# Altium PCB 显示与输入.PcbDoc (part 2 of 2)
Units mil, origin at the board's own origin, x right, y up, seen from the top; angles counter-clockwise.
Board outline 6446.74 x 5131.17 mil, 2 copper layers (Top Layer, Bottom Layer); 64 components, 63 nets, 238 pads, 176 vias.
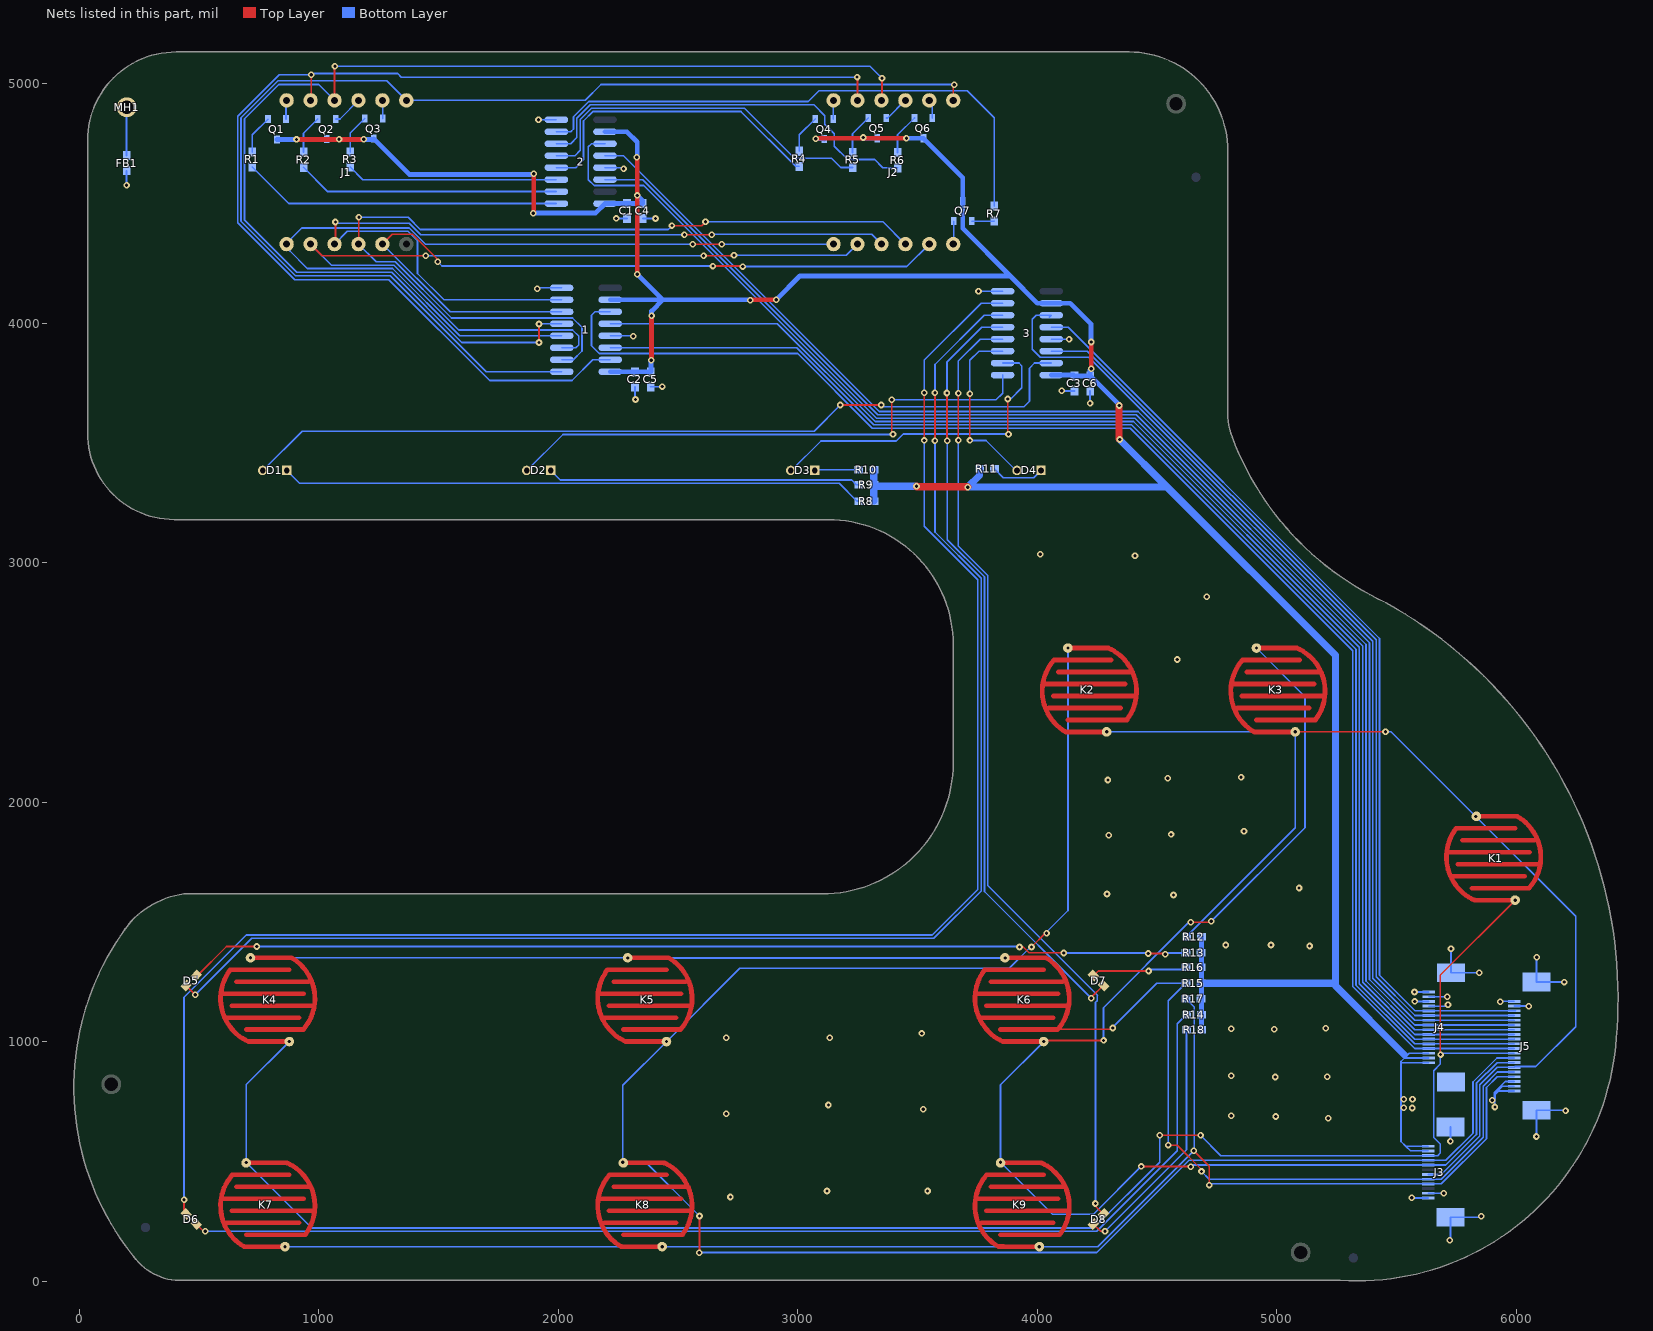
[diagram p2: the nets of this part, all layers, seen from the top]

## Footprints (in the part's own frame and the unit in brackets; to place one, negate y for a bottom-side part, rotate by r counter-clockwise, add the part's x,y. Pads: shape width x height; smd on the part's side, far side on the other; paste and mask are expansions set on the pad) (continued)
PCB-KEY#8 [mil]
  round 40 smd: 1(-169.96,-72) 2(179.96,90)
  Top Layer lines w20: 30,190 30,-150 ; -70,170 -70,-111.04 -70,-130 ; -20,150 -20,-190 ; 128.92,148.76 ccw(c0,0) -169.67,99.81 ; 130,148.76 130,-90 ; -169.88,97.95 -169.96,-72 ; -120,90 -120,-138.8 -120,-157.48 ; 179.88,-79.95 cw(c0,0) 80,-179.86 ; 179.88,-79.95 cw(c0,0) 80,-179.86 ; 179.88,-79.95 179.88,-79.95 ; 179.88,-79.95 179.88,-79.95 ; 179.88,-79.95 179.88,-79.95 ; 179.88,-79.95 179.88,-79.95 ; 179.88,-79.95 179.88,-79.95 ; 179.88,-79.95 179.88,-79.95 ; 179.88,-79.95 179.88,-79.95 ; 179.88,-79.95 179.88,-79.95 ; 179.88,-79.95 179.88,-79.95 ; 179.88,-79.95 179.88,-79.95 ; 179.88,-79.95 179.88,-79.95 ; 179.88,-79.95 179.88,-79.95 ; 179.88,-79.95 179.88,-79.95 ; 179.88,-79.95 179.88,-79.95 ; 179.88,-79.95 179.88,-79.95 ; 179.88,-79.95 179.88,-79.95 ; 179.88,-79.95 179.88,-79.95 ; 179.88,-79.95 179.88,-79.95 ; 179.88,-79.95 179.88,-79.95 ; 179.88,-79.95 179.88,-79.95 ; 179.88,-79.95 179.88,-79.95 ; 179.88,-79.95 179.88,-79.95 ; 179.88,-79.95 179.88,-79.95 ; 179.88,-79.95 179.88,-79.95 ; 179.88,-79.95 179.88,-79.95 ; 179.88,-79.95 179.88,-79.95 ; 179.88,-79.95 179.88,-79.95 ; 179.88,-79.95 179.88,-79.95 ; 179.88,-79.95 179.88,-79.95 ; 179.88,-79.95 179.88,-79.95 ; 179.88,-79.95 179.88,-79.95 ; 179.88,-79.95 179.88,-79.95 ; 179.88,-79.95 179.88,-79.95 ; 179.88,-79.95 179.88,-79.95 ; 179.88,-79.95 179.88,-79.95 ; 179.88,-79.95 179.88,-79.95 ; 179.88,-79.95 179.88,-79.95 ; 179.88,-79.95 179.88,-79.95 ; 179.88,-79.95 179.88,-79.95 ; 179.88,-79.95 179.88,-79.95 ; 179.88,-79.95 179.88,-79.95 ; 179.88,-79.95 179.88,-79.95 ; 179.88,-79.95 179.88,-79.95 ; 179.88,-79.95 179.88,-79.95 ; 179.88,-79.95 179.88,-79.95 ; 179.88,-79.95 179.88,-79.95 ; 179.88,-79.95 179.88,-79.95 ; 179.88,-79.95 179.88,-79.95 ; 179.88,-79.95 179.88,-79.95 ; 179.88,-79.95 179.88,-79.95 ; 179.88,-79.95 179.88,-79.95 ; 179.88,-79.95 179.88,-79.95 ; 179.88,-79.95 179.88,-79.95 ; 179.88,-79.95 179.88,-79.95 ; 179.88,-79.95 179.88,-79.95 ; 179.88,-79.95 179.96,90 179.88,-79.95 ; 179.88,-79.95 179.88,-79.95 ; 179.88,-79.95 179.88,-79.95 ; 179.88,-79.95 179.88,-79.95 ; 179.88,-79.95 179.88,-79.95 ; 179.88,-79.95 179.88,-79.95 ; 179.88,-79.95 179.88,-79.95 ; 179.88,-79.95 179.88,-79.95 ; 179.88,-79.95 179.88,-79.95 ; 179.88,-79.95 179.88,-79.95 ; 179.88,-79.95 179.88,-79.95 ; 179.88,-79.95 179.88,-79.95 ; 179.88,-79.95 179.88,-79.95 ; 179.88,-79.95 179.88,-79.95 ; 179.88,-79.95 179.88,-79.95 ; 179.88,-79.95 179.88,-79.95 ; 179.88,-79.95 179.88,-79.95 ; 179.88,-79.95 179.88,-79.95 ; 179.88,-79.95 179.88,-79.95 ; 179.88,-79.95 179.88,-79.95 ; 179.88,-79.95 179.88,-79.95 ; 179.88,-79.95 179.88,-79.95 ; 179.88,-79.95 179.88,-79.95 ; 179.88,-79.95 179.88,-79.95 ; 179.88,-79.95 179.88,-79.95 ; 179.88,-79.95 179.88,-79.95 ; 179.88,-79.95 179.88,-79.95 ; 179.88,-79.95 179.88,-79.95 ; 179.88,-79.95 179.88,-79.95 ; 179.88,-79.95 179.88,-79.95 ; 179.88,-79.95 179.88,-79.95 ; 179.88,-79.95 179.88,-79.95 ; 179.88,-79.95 179.88,-79.95 ; 179.88,-79.95 179.88,-79.95 ; 179.88,-79.95 179.88,-79.95 ; 179.88,-79.95 179.88,-79.95 ; 179.88,-79.95 179.88,-79.95 ; 179.88,-79.95 179.88,-79.95 ; 80,-179.86 cw(c0,0) 51.48,-190 cw(c0,0) -118.11,-157.48 ccw(c0,0) 80,-179.86 ; 80,-179.86 80,-180 80,-179.86 ; 80,-179.86 80,-179.86 ; 80,-179.86 80,-179.86 ; 80,-179.86 80,-179.86 ; 80,-179.86 80,-179.86 ; 80,-179.86 80,-179.86 ; 80,-179.86 80,-179.86 ; 80,-179.86 80,-179.86 ; 80,-179.86 80,-179.86 ; 80,-179.86 80,-179.86 ; 80,-179.86 80,-179.86 ; 80,-179.86 80,-179.86 ; 80,-179.86 80,-179.86 ; 80,-179.86 80,-179.86 ; 80,-179.86 80,-179.86 ; 80,-179.86 80,-179.86 ; 80,-179.86 80,-179.86 ; 80,-179.86 80,-179.86 ; 80,-179.86 80,-179.86 ; 80,-179.86 80,-179.86 ; 80,-179.86 80,-179.86 ; 80,-179.86 80,-179.86 ; 80,-179.86 80,-179.86 ; 80,-179.86 80,-179.86 ; 80,-179.86 80,-179.86 ; 80,-179.86 80,-179.86 ; 80,-179.86 80,-179.86 ; 80,-179.86 80,-179.86 ; 80,-179.86 80,-179.86 ; 80,-179.86 80,-179.86 ; 80,-179.86 80,-179.86 ; 80,-179.86 80,-179.86 ; 80,-179.86 80,-179.86 ; 80,-179.86 80,-179.86 ; 80,-179.86 80,-179.86 ; 80,-179.86 80,-179.86 ; 80,-179.86 80,-179.86 ; 80,-179.86 80,-179.86 ; 80,-179.86 80,-179.86 ; 80,-179.86 80,-179.86 ; 80,-179.86 80,-179.86 ; 80,-179.86 80,-179.86 ; 80,-179.86 80,-179.86 ; 80,-179.86 80,-179.86 ; 80,-179.86 80,-179.86 ; 80,-179.86 80,-179.86 ; 80,-179.86 80,-179.86 ; 80,-179.86 80,-179.86 ; 80,-179.86 80,-179.86 ; 80,-179.86 80,-179.86 ; 80,-179.86 80,-179.86 ; 80,-179.86 80,-179.86 ; 80,-179.86 80,-179.86 ; 80,-179.86 80,-179.86 ; 80,-179.86 80,-179.86 ; 80,-179.86 80,-179.86 ; 80,-179.86 80,-179.86 ; 80,-179.86 80,-179.86 ; 80,-179.86 80,-179.86 ; 80,-179.86 80,-179.86 ; 80,-179.86 80,-179.86 ; 80,-179.86 80,-179.86 ; 80,-179.86 80,-179.86 ; 80,-179.86 80,-179.86 ; 80,-179.86 80,-179.86 ; 80,-179.86 80,-179.86 ; 80,-179.86 80,-179.86 ; 80,-179.86 80,-179.86 ; 80,-179.86 80,-179.86 ; 80,-179.86 80,-179.86 ; 80,-179.86 80,-179.86 ; 80,-179.86 80,-179.86 ; 80,-179.86 80,-179.86 ; 80,-179.86 80,-179.86 ; 80,-179.86 80,-179.86 ; 80,-179.86 80,-179.86 ; 80,-179.86 80,-179.86 ; 80,-179.86 80,-179.86 ; 80,-179.86 80,-179.86 ; 80,-179.86 80,-179.86 ; 80,-179.86 80,-179.86 ; 80,-179.86 80,-179.86 ; 80,-179.86 80,-179.86 ; 80,-179.86 80,-179.86 ; 80,-179.86 80,-179.86 ; 80,-179.86 80,-179.86 ; 80,-179.86 80,-179.86 ; 80,-179.86 80,-179.86 ; 80,-179.86 80,-179.86 ; 80,-179.86 80,-179.86 ; 80,-179.86 80,-179.86 ; 80,-179.86 80,-179.86 ; 80,-179.86 80,130 80,-179.86 ; 80,-179.86 80,-179.86
PCB-KEY#9 [mil]
  round 40 smd: 1(-169.96,-72) 2(179.96,90)
  Top Layer lines w20: 30,190 30,-122.52 30,-150 ; -70,170 -70,78.05 -70,-130 ; -20,150 -20,-152.99 -20,-190 ; 128.92,148.76 ccw(c0,0) -169.67,99.81 ; 130,148.76 130,77.97 130,-90 ; -169.88,97.95 -169.89,77.07 -169.96,-72 ; -120,90 -120,-157.48 ; 179.96,90 179.96,89.51 ; 179.96,89.51 179.88,-79.95 ; 179.96,89.51 179.88,-79.95 ; 179.88,-79.95 cw(c0,0) 80,-179.86 ; 179.88,-79.95 cw(c0,0) 80,-179.86 ; 179.88,-79.95 179.88,-79.95 ; 179.88,-79.95 179.88,-79.95 ; 179.88,-79.95 179.88,-79.95 ; 179.88,-79.95 179.88,-79.95 ; 179.88,-79.95 179.88,-79.95 ; 179.88,-79.95 179.88,-79.95 ; 179.88,-79.95 179.88,-79.95 ; 179.88,-79.95 179.88,-79.95 ; 179.88,-79.95 179.88,-79.95 ; 179.88,-79.95 179.88,-79.95 ; 179.88,-79.95 179.88,-79.95 ; 179.88,-79.95 179.88,-79.95 ; 179.88,-79.95 179.88,-79.95 ; 179.88,-79.95 179.88,-79.95 ; 179.88,-79.95 179.88,-79.95 ; 179.88,-79.95 179.88,-79.95 ; 179.88,-79.95 179.88,-79.95 ; 179.88,-79.95 179.88,-79.95 ; 179.88,-79.95 179.88,-79.95 ; 179.88,-79.95 179.88,-79.95 ; 179.88,-79.95 179.88,-79.95 ; 179.88,-79.95 179.88,-79.95 ; 179.88,-79.95 179.88,-79.95 ; 179.88,-79.95 179.88,-79.95 ; 179.88,-79.95 179.88,-79.95 ; 179.88,-79.95 179.88,-79.95 ; 179.88,-79.95 179.88,-79.95 ; 179.88,-79.95 179.88,-79.95 ; 179.88,-79.95 179.88,-79.95 ; 179.88,-79.95 179.88,-79.95 ; 179.88,-79.95 179.88,-79.95 ; 179.88,-79.95 179.88,-79.95 ; 179.88,-79.95 179.88,-79.95 ; 179.88,-79.95 179.88,-79.95 ; 179.88,-79.95 179.88,-79.95 ; 179.88,-79.95 179.88,-79.95 ; 179.88,-79.95 179.88,-79.95 ; 179.88,-79.95 179.88,-79.95 ; 179.88,-79.95 179.88,-79.95 ; 179.88,-79.95 179.88,-79.95 ; 179.88,-79.95 179.88,-79.95 ; 179.88,-79.95 179.88,-79.95 ; 179.88,-79.95 179.88,-79.95 ; 179.88,-79.95 179.88,-79.95 ; 179.88,-79.95 179.88,-79.95 ; 179.88,-79.95 179.88,-79.95 ; 179.88,-79.95 179.88,-79.95 ; 179.88,-79.95 179.88,-79.95 ; 179.88,-79.95 179.88,-79.95 ; 179.88,-79.95 179.88,-79.95 ; 179.88,-79.95 179.88,-79.95 ; 179.88,-79.95 179.88,-79.95 ; 179.88,-79.95 179.88,-79.95 ; 179.88,-79.95 179.88,-79.95 ; 179.88,-79.95 179.88,-79.95 ; 179.88,-79.95 179.88,-79.95 ; 179.88,-79.95 179.88,-79.95 ; 179.88,-79.95 179.88,-79.95 ; 179.88,-79.95 179.88,-79.95 ; 179.88,-79.95 179.88,-79.95 ; 179.88,-79.95 179.88,-79.95 ; 179.88,-79.95 179.88,-79.95 ; 179.88,-79.95 179.88,-79.95 ; 179.88,-79.95 179.88,-79.95 ; 179.88,-79.95 179.88,-79.95 ; 179.88,-79.95 179.88,-79.95 ; 179.88,-79.95 179.88,-79.95 ; 179.88,-79.95 179.88,-79.95 ; 179.88,-79.95 179.88,-79.95 ; 179.88,-79.95 179.88,-79.95 ; 179.88,-79.95 179.88,-79.95 ; 179.88,-79.95 179.88,-79.95 ; 179.88,-79.95 179.88,-79.95 ; 179.88,-79.95 179.88,-79.95 ; 179.88,-79.95 179.88,-79.95 ; 179.88,-79.95 179.88,-79.95 ; 179.88,-79.95 179.88,-79.95 ; 179.88,-79.95 179.88,-79.95 ; 179.88,-79.95 179.88,-79.95 ; 179.88,-79.95 179.88,-79.95 ; 179.88,-79.95 179.88,-79.95 ; 179.88,-79.95 179.88,-79.95 ; 179.88,-79.95 179.88,-79.95 ; 179.88,-79.95 179.88,-79.95 ; 179.88,-79.95 179.88,-79.95 ; 179.88,-79.95 179.88,-79.95 ; 179.88,-79.95 179.88,-79.95 ; 179.88,-79.95 179.88,-79.95 ; 179.88,-79.95 179.88,-79.95 ; 179.88,-79.95 179.88,-79.95 ; 80,-179.86 cw(c0,0) 51.48,-190 cw(c0,0) 22.56,-195.55 cw(c0,0) -118.11,-157.48 ccw(c0,0) 80,-179.86 ; 80,-179.86 80,-180 80,-179.86 ; 80,-179.86 80,-179.86 ; 80,-179.86 80,-179.86 ; 80,-179.86 80,-179.86 ; 80,-179.86 80,-179.86 ; 80,-179.86 80,-179.86 ; 80,-179.86 80,-179.86 ; 80,-179.86 80,-179.86 ; 80,-179.86 80,-179.86 ; 80,-179.86 80,-179.86 ; 80,-179.86 80,-179.86 ; 80,-179.86 80,-179.86 ; 80,-179.86 80,-179.86 ; 80,-179.86 80,-179.86 ; 80,-179.86 80,-179.86 ; 80,-179.86 80,-179.86 ; 80,-179.86 80,-179.86 ; 80,-179.86 80,-179.86 ; 80,-179.86 80,-179.86 ; 80,-179.86 80,-179.86 ; 80,-179.86 80,-179.86 ; 80,-179.86 80,-179.86 ; 80,-179.86 80,-179.86 ; 80,-179.86 80,-179.86 ; 80,-179.86 80,-179.86 ; 80,-179.86 80,-179.86 ; 80,-179.86 80,-179.86 ; 80,-179.86 80,-179.86 ; 80,-179.86 80,-179.86 ; 80,-179.86 80,-179.86 ; 80,-179.86 80,-179.86 ; 80,-179.86 80,-179.86 ; 80,-179.86 80,-179.86 ; 80,-179.86 80,-179.86 ; 80,-179.86 80,-179.86 ; 80,-179.86 80,-179.86 ; 80,-179.86 80,-179.86 ; 80,-179.86 80,-179.86 ; 80,-179.86 80,-179.86 ; 80,-179.86 80,-179.86 ; 80,-179.86 80,-179.86 ; 80,-179.86 80,-179.86 ; 80,-179.86 80,-179.86 ; 80,-179.86 80,-179.86 ; 80,-179.86 80,-179.86 ; 80,-179.86 80,-179.86 ; 80,-179.86 80,-179.86 ; 80,-179.86 80,-179.86 ; 80,-179.86 80,-179.86 ; 80,-179.86 80,-179.86 ; 80,-179.86 80,-179.86 ; 80,-179.86 80,-179.86 ; 80,-179.86 80,-179.86 ; 80,-179.86 80,-179.86 ; 80,-179.86 80,-179.86 ; 80,-179.86 80,-179.86 ; 80,-179.86 80,-179.86 ; 80,-179.86 80,-179.86 ; 80,-179.86 80,-179.86 ; 80,-179.86 80,-179.86 ; 80,-179.86 80,-179.86 ; 80,-179.86 80,-179.86 ; 80,-179.86 80,-179.86 ; 80,-179.86 80,-179.86 ; 80,-179.86 80,-179.86 ; 80,-179.86 80,-179.86 ; 80,-179.86 80,-179.86 ; 80,-179.86 80,-179.86 ; 80,-179.86 80,-179.86 ; 80,-179.86 80,-179.86 ; 80,-179.86 80,-179.86 ; 80,-179.86 80,-179.86 ; 80,-179.86 80,-179.86 ; 80,-179.86 80,-179.86 ; 80,-179.86 80,-179.86 ; 80,-179.86 80,-179.86 ; 80,-179.86 80,-179.86 ; 80,-179.86 80,-179.86 ; 80,-179.86 80,-179.86 ; 80,-179.86 80,-179.86 ; 80,-179.86 80,-179.86 ; 80,-179.86 80,-179.86 ; 80,-179.86 80,-179.86 ; 80,-179.86 80,-179.86 ; 80,-179.86 80,-179.86 ; 80,-179.86 80,-179.86 ; 80,-179.86 80,-179.86 ; 80,-179.86 80,-179.86 ; 80,-179.86 80,-179.86 ; 80,-179.86 80,-179.86 ; 80,-179.86 80,-179.86 ; 80,-179.86 80,130 80,-179.86
Res0603 [mm] "0603电阻"
  rect 0.965x0.8 smd: 1(-0.8,0) 2(0.8,0)
  silkscreen extent -1.28,-0.6 1.28,0.6
SOIC-16 [mm]
  oval 2.5x0.7 smd: 1(-2.577,4.445) 2(-2.577,3.175) 3(-2.577,1.905) 4(-2.577,0.635) 5(-2.577,-0.635) 6(-2.577,-1.905) 7(-2.577,-3.175) 8(-2.577,-4.445) 9(2.577,-4.445) 10(2.577,-3.175) 11(2.577,-1.905) 12(2.577,-0.635) 13(2.577,0.635) 14(2.577,1.905) 15(2.577,3.175) 16(2.577,4.445)
  silkscreen extent -2.57,-5 0.8,5.47, body extent -2.88,-4.92 2.92,4.88, height 1.75
SOT-23B [mm] "SOT23, 3-Leads, Body 2.9x1.3mm, Pitch 0.95mm, Lead Span 2.4mm, IPC High Density"
  rect 0.85x0.6 smd: 1(-1.075,0.95) 2(-1.075,-0.95) 3(1.075,0)
  silkscreen extent -1.2,-1.5 0.7,1.92, body extent -0.7,-1.5 0.7,1.5, height 1.14

## Part data
C1 C2 C3 C4 C5 C6: library part "Cap Semi", "无极性电容（表贴）"
FB1: library part FerriteBead, "磁珠"
J1: "共阳3位数码管"
J2: "共阳4位数码管"
MH1 MH2 MH3 MH4: "固定孔"
MK1 MK2 MK3: "贴片马克点"
Q1 Q2 Q3 Q4 Q5 Q6 Q7: "PNP"
R1 R2 R3 R4 R5 R6 R7 R8 R9 R10 R11 R12 R13 R14 R15 R16 R17 R18: library part Res, "电阻"

## Via types
v1: diameter 27.56, hole 13.78, Top Layer to Bottom Layer, 176 vias

## Nets (pads, with @x,y where several pads share a name; then routed paths per layer and width w, separated by ;. In a path a pad name is that pad's centre, name@x,y a point inside that pad or via, vN(x,y) a via of type N, cw(c..) or ccw(c..) an arc to the next point about the centre after c; other vN are vias at no path point)
A: 1.15 J1.11 J2.11 | length 5189.9
  Top Layer w7: J1.11@966.14,4930.71 969,4933.57 v1(969,5038) ; v1(3248,5028) 3249.61,5026.39 J2.11@3249.61,4930.71
  Bottom Layer w7: 1.15@2217.46,3848 2145,3848 2058,3761 1714,3761 1293,4182 900.4,4182 662,4420.4 662,4864.6 835.4,5038 v1(969,5038) 969,5032 972,5035 980,5043 1329.65,5043 1344.65,5028 v1(3248,5028)
A0: J3.10 J5.12 K1.2 K4.2 K7.2 | length 7466.1
  Top Layer w7: K7.2@697.4,494.92 v1(697.4,496.4) ; v1(4511,610) v1(4682,610) ; v1(5684,947) 5683,948 5683,1279.18 v1(5995.51,1591.69)
  Top Layer w20: v1(876.6,1001.14) K4.2@877.4,1001.14
  Bottom Layer w7: v1(876.6,1001.14) 697.4,821.94 v1(697.4,496.4) 970.8,223 4236,223 4511,498 v1(4511,610) ; v1(4682,610) 4766.88,525.12 J3.10@5632.75,525.12 5672.12,525.12 5683,536 5683,573.46 5655.7,600.76 5655.7,880.07 5683,907.37 5683,946 v1(5684,947) 5684,950 5686.68,952.68 J5.12@5991.75,952.68
A1: J3.9 J5.13 K2.2 K5.2 K8.2 | length 8018.6
  Top Layer w7: v1(2270,497.13) K8.2@2272.2,494.92 ; v1(2589,119) 2590,120 v1(2590,273) ; v1(3976,1396) 4034,1454 v1(4039,1454)
  Top Layer w20: K2.2@4127.86,2644.17 v1(4128.3,2644.17)
  Bottom Layer w7: v1(2589,119) 2590.72,120.72 4248.85,120.72 4633.57,505.43 J3.9@5632.75,505.43 5706.24,505.43 5819.72,618.92 5819.72,832.72 5919.99,932.99 J5.13@5991.75,932.99 ; v1(2590,273) 2365.87,497.13 v1(2270,497.13) 2270,818.94 v1(2452.2,1001.14) 2758.06,1307 3883,1307 3974,1398 v1(3976,1396) ; v1(4039,1454) 4039,1459 4128.3,1548.3 v1(4128.3,2644.17)
A8: J3.8 J5.14 K3.2 K6.2 K9.2 | length 5582.3
  Top Layer w7: K9.2@3847.01,494.92 v1(3847,497) ; v1(4027.01,1001.14) 4031.87,1006 v1(4277,1006) ; v1(4435,480) 4639,480 v1(4641,478) ; v1(4641,1499) 4723,1499 v1(4727,1503)
  Bottom Layer w7: v1(4027.01,1001.14) 3847,821.13 v1(3847,497) 4064,280 4235,280 v1(4435,480) ; v1(4277,1006) 4277,1143.09 4632.91,1499 v1(4641,1499) ; v1(4641,478) 4641,482 4644.75,485.75 J3.8@5632.75,485.75 5706.35,485.75 5833.72,613.12 5833.72,826.92 5920.11,913.31 J5.14@5991.75,913.31 ; v1(4727,1503) 5118,1894 5118,2441.43 v1(4915.26,2644.17)
B: 1.1 J1.7 J2.7 | length 5216.1
  Top Layer w7: J2.7@3649.61,4930.71 3649.61,4991.61 v1(3654,4996)
  Bottom Layer w7: 1.1@2014.54,3798 1700,3798 1299,4199 903.2,4199 676,4426.2 676,4858.8 830.2,5013 1283.85,5013 J1.7@1366.14,4930.71 2112.51,4930.71 2178.8,4997 3643.21,4997 3649.1,4991.1 3654,4986.21 v1(3654,4996)
C: 1.2 J1.4 J2.4 | length 3743.2
  Top Layer w7: J1.4@1166.14,4330.71 1168,4332.57 v1(1168,4443) ; v1(2475,4408) 2599,4408 v1(2615,4424)
  Bottom Layer w7: J1.4@1166.14,4330.71 1239.85,4257 1320.2,4257 1554.92,4022.28 2060.03,4022.28 2099.31,3983 2099.31,3884.69 2062.63,3848 1.2@2014.54,3848 ; v1(1168,4443) 1373.4,4443 1424.4,4392 2459,4392 v1(2475,4408) ; v1(2615,4424) 3356.31,4424 J2.4@3449.61,4330.71
D: 1.3 J1.2 J2.2 | length 3715.1
  Top Layer w7: J1.2@966.14,4330.71 1014.85,4282 v1(1447,4282) ; v1(2607,4282) 2732,4282 v1(2734,4284)
  Bottom Layer w7: J1.2@966.14,4330.71 1053.85,4243 1314.4,4243 1585.12,3972.28 2060.03,3972.28 2085.31,3947 2085.31,3909.31 2074,3898 1.3@2014.54,3898 ; v1(1447,4282) v1(2607,4282) ; v1(2734,4284) 3202.9,4284 J2.2@3249.61,4330.71
D1: J1.12 Q1.2 | length 79.5
  Bottom Layer w7: Q1.2@863.4,4852.32 863.4,4927.97 J1.12@866.14,4930.71
D2: J1.9 Q2.2 | length 126.8
  Bottom Layer w7: Q2.2@1071.4,4853.32 1088.76,4853.32 J1.9@1166.14,4930.71
D3: J1.8 Q3.2 | length 75.9
  Bottom Layer w7: J1.8@1266.14,4930.71 1267.4,4929.45 Q3.2@1267.4,4855.32
D4: J2.12 Q4.2 | length 77.9
  Bottom Layer w7: Q4.2@3148.4,4853.32 3148.4,4929.5 J2.12@3149.61,4930.71
D5: J2.9 Q5.2 | length 110.6
  Bottom Layer w7: Q5.2@3369.4,4857.32 3376.22,4857.32 J2.9@3449.61,4930.71
D6: J2.8 Q6.2 | length 78.7
  Bottom Layer w7: J2.8@3549.61,4930.71 3562.4,4917.91 Q6.2@3562.4,4857.32
D7: J2.6 Q7.2 | length 96.8
  Bottom Layer w7: J2.6@3649.61,4330.71 3651.6,4332.7 Q7.2@3651.6,4426.68
DC3V3: 1.10 1.16 2.10 2.16 3.10 3.16 C1.2 C2.2 C3.2 C4.2 C5.2 C6.2 J3.11 J3.12 J4.1 J4.2 J4.3 J5.18 J5.19 J5.20 Q1.3 Q2.3 Q3.3 Q4.3 Q5.3 Q6.3 Q7.3 R8.1 R9.1 R10.1 R11.1 R12.1 R13.1 R14.1 R15.1 R16.1 R17.1 R18.1 | length 14104.3
  Top Layer w7: v1@5905,727 5906,728 v1(5911,728)
  Top Layer w20: v1(907.32,4767.68) 1085.32,4767.68 1187.68,4767.68 v1(1188,4768) ; v1(1896,4460) 1898,4462 v1(1898,4625) ; v1(2330,4205) v1(2330,4534) v1@2330,4691 ; v1(2388,3846) 2390,3846 v1(2390,4032) ; v1(2802,4096) 2804.5,4098.5 2910.5,4098.5 v1(2911,4099) ; v1(3076,4771) 3078,4773 3274,4773 v1(3454,4773) ; v1(4226,3810) v1(4226,3922) ; v1@4342,3517 v1(4344,3515)
  Top Layer w30: v1(3496,3320) 3496,3318 3708,3318 v1(3710,3316) ; v1@4342,3517 v1(4342,3657)
  Bottom Layer w7: 5533.64,945.36 5533.64,932.64 ; J3.11@5632.75,544.8 5558.2,544.8 5538.6,564.4 ; J3.12@5632.75,564.49 5538.68,564.49 5538.6,564.4 ; J4.1@5635.06,912.95 5519.05,912.95 5519,913 ; J4.2@5635.06,932.64 5533.64,932.64 ; J4.3@5635.06,952.32 5553.32,952.32 5533.64,932.64 ; v1@5908,762 5908,788 5954.57,834.57 J5.18@5991.75,834.57 ; v1(5911,728) 5909.86,729.14 5909.86,756 5909.86,781.86 5942.88,814.88 J5.19@5991.75,814.88 ; v1@5912,762 5912,780 5927.2,795.2 J5.20@5991.75,795.2 ; 5519,913 5519,760 5519,725 5519,584 5538.6,564.4 ; 5519,913 5519,918 5533.64,932.64
  Bottom Layer w20: Q1.3@826,4767.68 v1(907.32,4767.68) ; Q2.3@1034,4768.68 v1(1085.32,4768.68) ; v1(1188,4768) 1227.32,4768 Q3.3@1230,4770.68 1379.68,4621 1894,4621 v1(1898,4625) ; v1(1896,4460) 1897,4461 2156.46,4461 2.16@2195.46,4500 2287.32,4500 2352.82,4500 2352.82,4500.5 2352.82,4511.18 v1(2330,4534) ; 2.10@2195.46,4800 2287,4800 2330,4757 2330,4695 v1(2328,4693) ; 1.16@2217.46,3798 2320.69,3798 2385.18,3798 C5.2@2385.69,3797.5 2388,3799.81 v1(2388,3846) ; 1.10@2217.46,4098 2437,4098 ; v1(2330,4205) 2437,4098 ; v1(2390,4032) 2390,4051 2437,4098 ; v1(2802,4096) 2804.48,4098.48 2804,4098 2802,4098 2437,4098 ; v1(2911,4099) 3009.5,4197.5 3887.5,4197.5 ; v1(3076,4771) 3108.68,4771 Q4.3@3111,4768.68 ; v1(3274,4776) 3277.32,4772.68 Q5.3@3332,4772.68 ; v1(3454,4773) 3454.32,4772.68 Q6.3@3525,4772.68 3689,4608.68 Q7.3@3689,4511.32 3689,4396 3887.5,4197.5 ; 3.16@4058.46,3784 4152.18,3784 C3.2@4155.69,3780.5 C6.2@4220.69,3780.5 ; v1(4226,3810) 4220.69,3804.69 C6.2@4220.69,3780.5 ; v1(4226,3922) 4225,3923 4225,3997 4138,4084 3.10@4058.46,4084 4001,4084 3887.5,4197.5 ; v1(4342,3657) 4342,3659.18 C6.2@4220.69,3780.5 ; R12.1@4685.5,1439 4685.5,1373 4685.5,1312 4685.5,1245 4685.5,1180 R14.1@4685.5,1113 4685.5,1052 R18.1@4686.5,1051
  Bottom Layer w30: R10.1@3317.5,3389 3317.5,3326 3317.5,3259 R8.1@3318.5,3258 ; R9.1@3318.5,3326 3324.5,3320 v1(3496,3320) ; R11.1@3758.5,3393 3758.5,3364.5 v1(3710,3316) 4543,3316 ; v1(4344,3515) 4543,3316 ; R15.1@4683.5,1245 4685.5,1245 5245,1245 ; 5533.64,945.36 5245,1234 5245,1245 ; 4543,3316 5245,2614 5245,1245
  other v1: 5566,724 5530,725 5900,756 5530,760 5567,760
DGND: 1.8 1.13 2.8 2.13 3.8 3.13 C1.1 C2.1 C3.1 C4.1 C5.1 C6.1 FB1.1 J3.1 J3.2 J3.13 J3.14 J4.13 J4.14 J4.15 J4.16 J4.17 J4.18 J5.1 J5.2 J5.21 J5.22 | length 2415.5
  Top Layer w7: v1@5575,1208 v1(5575.23,1208.23) ; v1(5576.14,1168.86) v1@5577,1168 ; v1(5697.36,367.64) v1@5699,366 ; v1@5715,1148 v1(5715,1155) ; v1@5724,584 ccw(c5724,585.25) v1(5725.25,585.25) ; v1(5727.57,1388.57) v1@5729,1390 ; v1(5854,272) v1@5855,272 ; v1@5932,1167 v1(5933,1167) ; v1(6084.25,604.75) v1@6088,601 ; v1(6200.65,1249.65) v1@6203,1252 ; v1@6206,710 v1(6206,713)
  Bottom Layer w7: v1(198,4577) FB1.1@198,4637.5 ; v1(1913,4144) 1917,4148 1.8@2014.54,4148 ; v1(1918,4850) 2.8@1992.54,4850 ; 2.13@2195.46,4650 2268,4650 v1(2273,4645) ; 1.13@2217.46,3948 2311,3948 v1(2313,3946) ; v1(2243,4438) 2243.5,4437.5 C1.1@2287.32,4437.5 ; C2.1@2320.69,3734.5 2320.69,3684.31 v1(2323,3682) ; C4.1@2353.32,4437.5 v1(2406.5,4437.5) ; C5.1@2385.69,3734.5 2433.5,3734.5 v1(2435,3736) ; v1(3755,4134) 3.8@3855.54,4134 ; 3.13@4058.46,3934 v1(4133,3934) ; v1(4103,3718) 4103.5,3717.5 C3.1@4155.69,3717.5 ; v1(4220.69,3665.69) C6.1@4220.69,3717.5 ; v1(5564,349) 5565.05,347.95 J3.1@5632.75,347.95 ; v1(5575.23,1208.23) J4.16@5635.06,1208.23 ; v1(5576.14,1168.86) J4.14@5635.06,1168.86 ; J3.2@5632.75,367.64 v1(5697.36,367.64) ; J4.13@5635.06,1149.17 5714.83,1149.17 5715,1149.35 v1(5715,1155) ; J4.15@5635.06,1188.54 5711.46,1188.54 v1(5712,1188) ; v1(5723,172) 5725.25,174.25 J3.13@5725.25,267.52 5849.52,267.52 v1(5854,272) ; v1(5725.25,585.25) J3.14@5725.25,644.48 ; v1(5727.57,1388.57) J4.18@5727.57,1288.66 5844.34,1288.66 v1(5845,1288) ; v1(5933,1167) 5935.21,1169.21 J5.1@5991.75,1169.21 ; J5.2@5991.75,1149.53 6051.47,1149.53 v1(6052,1149) ; v1(6084.25,604.75) J5.22@6084.25,714.75 6204.25,714.75 v1(6206,713) ; v1(6085,1353) 6084.25,1352.25 J5.21@6084.25,1249.65 v1(6200.65,1249.65)
  other v1: 2719.23,352.23 3122.23,377.23 3542.23,377.23 5215.23,681.23 4996.23,688.23 4810.23,691.23 2701.23,700.23 3524.23,718.23 3128.23,736.23 4993.23,853.23 5211.23,854.23 4810.23,858.23 2701.23,1017.23 3134.23,1017.23 3518.23,1035.23 4990.23,1053.23 4810.23,1054.23 5205.23,1056.23 5137.23,1400.23 4787.23,1404.23 4976.23,1404.23 4569.23,1613.23 4291.23,1617.23 5093.23,1642.23 4299.23,1863.23 4559,1866 4863.23,1879.23 4295.23,2093.23 4545.23,2101.23 4851.23,2105.23 4585.23,2596.23 4707.23,2858.23 4408.23,3029.23 4012.23,3035.23
DS1: 1.14 J4.5 J5.10 | length 5799.4
  Bottom Layer w7: 1.14@2217.46,3898 2995.4,3898 3317.4,3576 4393.8,3576 5331,2638.8 5331,1237.01 5576.31,991.69 J4.5@5635.06,991.69 5991.39,991.69 J5.10@5991.75,992.05
DS2: 2.14 J4.8 J5.7 | length 6089.3
  Bottom Layer w7: 2.14@2195.46,4600 2352.8,4600 3334.8,3618 4413.8,3618 5373,2658.8 5373,1254.4 5576.65,1050.75 J4.8@5635.06,1050.75 5991.39,1050.75 J5.7@5991.75,1051.1
DS3: 3.14 J4.11 J5.4 | length 3906.4
  Bottom Layer w7: 3.14@4058.46,3884 4209.2,3884 5415,2678.2 5415,1271.8 5576.99,1109.8 J4.11@5635.06,1109.8 5635.42,1110.16 J5.4@5991.75,1110.16
E: 1.4 J1.1 J2.1 | length 3591.3
  Top Layer w7: v1(2561.42,4330.42) v1(2683,4330.42)
  Bottom Layer w7: 880.08,4301.92 953,4229 1308.6,4229 1589.6,3948 1.4@2014.54,3948 ; 885.79,4353.79 930,4398 1378.8,4398 1446.38,4330.42 v1(2561.42,4330.42) ; v1(2683,4330.42) 2683.29,4330.71 J2.1@3149.61,4330.71
F: 1.5 J1.10 J2.10 | length 5039.3
  Top Layer w7: J1.10@1066.14,4930.71 1066.14,5071.14 v1(1068,5073) ; v1(1920,3920) v1(1920,3997) ; J2.10@3349.61,4930.71 3352,4933.1 v1(3352,5023)
  Bottom Layer w7: J1.10@1066.14,4930.71 999.85,4997 834,4997 690,4853 690,4432 909,4213 1304.8,4213 1597.8,3920 v1(1920,3920) ; v1(1068,5073) 3302,5073 v1(3352,5023) ; v1(1920,3997) 1921,3998 1.5@2014.54,3998
G: 1.6 J1.5 J2.5 | length 3265.5
  Top Layer w7: J1.5@1266.14,4330.71 1306.64,4371.21 1392.13,4371.21 1497,4266.34 v1(1497,4257) ; v1(2646,4239) 2769,4239 v1(2771,4237)
  Bottom Layer w7: J1.5@1266.29,4330.71 1548.99,4048 1.6@2014.54,4048 ; v1(1497,4257) 1515,4239 v1(2646,4239) ; v1(2771,4237) 3455.9,4237 J2.5@3549.61,4330.71
H: 1.7 J1.3 J2.3 | length 3584.3
  Top Layer w7: J1.3@1066.14,4330.71 1070,4334.57 v1(1070,4423) ; v1(2527,4370) v1(2641,4370)
  Bottom Layer w7: J1.3@1066.14,4330.71 1119.43,4384 1373,4384 1413,4344 1413,4208 1523,4098 1.7@2014.54,4098 ; v1(1070,4423) 1070,4418 1378.6,4418 1426.6,4370 v1(2527,4370) ; v1(2641,4370) 2642.21,4371.21 3309.11,4371.21 J2.3@3349.61,4330.71
LED0: 3.15 D1.K | length 3561.3
  Top Layer w7: v1(3178,3659) v1(3349,3659)
  Bottom Layer w7: D1.K@773,3392 931,3550 3069,3550 v1(3178,3659) ; v1(3349,3659) 3349,3651 3945,3651 3968,3674 3968,3813 3989,3834 3.15@4058.46,3834
LED1: 3.1 D2.K | length 2287.2
  Top Layer w7: v1(3393,3681) 3393,3542 v1(3398,3537)
  Bottom Layer w7: D2.K@1869.16,3385.16 2020,3536 3397,3536 v1(3398,3537) ; v1(3393,3681) 3828,3681 3855.54,3708.54 3.1@3855.54,3784
LED2: 3.2 D3.K | length 1376.9
  Top Layer w7: v1(3877,3684) 3877,3540 v1(3880,3537)
  Bottom Layer w7: D3.K@2972.35,3384.35 3097,3509 3412,3509 3441,3538 3880,3538 3881,3538 v1(3880,3537) ; 3.2@3855.54,3834 3924,3834 3936,3822 3936,3731 3889,3684 v1(3877,3684)
LED3: 3.3 D4.K | length 734.5
  Top Layer w7: v1(3719,3511) v1(3719,3706)
  Bottom Layer w7: v1(3719,3511) 3786,3511 D4.K@3913.46,3383.54 ; v1(3719,3706) 3719,3846 3757,3884 3.3@3855.54,3884
LED4: 3.4 D8.K | length 4042.8
  Top Layer w7: v1(3671,3512) v1(3671,3708) ; v1(4243,325) 4243,314.98 D8.K@4277.02,280.96
  Bottom Layer w7: v1(3671,3512) 3671,3070.4 3794,2947.4 3794,1653 4252,1195 4250.28,1193.28 4250.28,1171.94 4243,1164.66 v1(4243,325) ; v1(3671,3708) 3671,3843 3762,3934 3.4@3855.54,3934
LED5: 3.5 D7.K | length 3274
  Top Layer w7: v1(3623,3709) 3623,3512 v1(3625,3510) ; v1(4226,1182) 4226,1186 4274.79,1234.79 D7.K@4277.02,1234.79
  Bottom Layer w7: v1(3623,3709) 3623,3838 3769,3984 3.5@3855.54,3984 ; v1(3625,3510) 3625,3096.6 3780,2941.6 3780,1628 v1(4226,1182)
LED6: 3.6 D5.K | length 6163.7
  Top Layer w7: D5.K@447.39,1234.79 447.39,1234.61 v1(485,1197) ; v1(3573,3510) v1(3573,3710)
  Bottom Layer w7: v1(485,1197) 720,1432 3567.8,1432 3766,1630.2 3766,2935.8 3573,3128.8 v1(3573,3510) v1@3576,3507 ; v1(3573,3710) 3573,3828 3779,4034 3.6@3855.54,4034
LED7: 3.7 D6.K | length 7138.8
  Top Layer w7: v1(438,341) 438,290.35 D6.K@447.39,280.96 ; v1(3529,3511) v1(3529,3710)
  Bottom Layer w7: v1(438,341) 438,1186 698,1446 3562,1446 3752,1636 3752,2930 3529,3153 v1(3529,3511) v1@3530,3512 ; v1(3529,3710) 3529,3847 3766,4084 3.7@3855.54,4084
NetD1_A: D1.A R8.2 | length 2442.3
  Bottom Layer w7: D1.A@866.14,3385.83 919.97,3332 3173,3332 3247,3258 R8.2@3255.5,3258
NetD2_A: D2.A R9.2 | length 1311.8
  Bottom Layer w7: D2.A@1968.5,3385.83 2008.33,3346 3225,3346 3245,3326 R9.2@3255.5,3326
NetD3_A: D3.A R10.2 | length 185
  Bottom Layer w7: D3.A@3070.87,3385.83 3074.04,3389 R10.2@3254.5,3389
NetD4_A: D4.A R11.2 | length 222.2
  Bottom Layer w7: R11.2@3821.5,3393 3858.85,3355.64 3985.56,3355.64 D4.A@4015.75,3385.83
NetD5_A: D5.A R13.2 | length 4208.8
  Top Layer w7: D5.A@489.14,1276.55 493.55,1276.55 615,1398 v1(742,1398) ; v1(3926,1396) 3941.66,1396 3965.94,1371.72 4110.28,1371.72 v1(4111,1371) ; v1(4464,1369) 4532,1369 v1(4535,1366)
  Bottom Layer w7: v1(742,1398) 3924,1398 v1(3926,1396) ; v1(4111,1371) 4462,1371 v1(4464,1369) ; v1(4535,1366) 4530,1371 4535,1371 4619.5,1371 R13.2@4621.5,1373
NetD6_A: D6.A R14.2 | length 4830.9
  Top Layer w7: D6.A@489.14,239.2 519.35,209 v1(527,209)
  Bottom Layer w7: v1(527,209) 4248.66,209 4585,545.34 4585,1075.5 R14.2@4622.5,1113
NetD7_A: D7.A R16.2 | length 403.4
  Top Layer w7: D7.A@4235.27,1276.55 4254.72,1296 v1(4465,1296)
  Bottom Layer w7: v1(4465,1296) 4465,1302 4610.5,1302 R16.2@4620.5,1312
NetD8_A: D8.A R18.2 | length 1043.3
  Top Layer w7: D8.A@4235.27,239.2 4265.47,209 v1(4283,209)
  Bottom Layer w7: v1(4283,209) 4623.5,549.5 R18.2@4623.5,1051
NetFB1_2: FB1.2 MH1.MH1 | length 201.9
  Bottom Layer w7: FB1.2@198,4700.5 198,4901 MH1.MH1@199,4902
NetQ1_1: Q1.1 R1.2 | length 164
  Bottom Layer w7: R1.2@723,4715.5 723,4786.72 Q1.1@788.6,4852.32
NetQ2_1: Q2.1 R2.2 | length 163.5
  Bottom Layer w7: R2.2@937,4714.5 937,4793.72 Q2.1@996.6,4853.32
NetQ3_1: Q3.1 R3.2 | length 164.9
  Bottom Layer w7: R3.2@1132,4715.5 1132,4794.72 Q3.1@1192.6,4855.32
NetQ4_1: Q4.1 R4.2 | length 162.4
  Bottom Layer w7: R4.2@3007,4718.5 3007,4786.72 Q4.1@3073.6,4853.32
NetQ5_1: Q5.1 R5.2 | length 171
  Bottom Layer w7: R5.2@3229,4713.5 3229,4791.72 Q5.1@3294.6,4857.32
NetQ6_1: Q6.1 R6.2 | length 174.1
  Bottom Layer w7: R6.2@3417,4712.5 3417,4786.72 Q6.1@3487.6,4857.32
NetQ7_1: Q7.1 R7.2 | length 94.7
  Bottom Layer w7: Q7.1@3726.4,4426.68 3820.83,4426.68 R7.2@3821,4426.5
PC4: J3.6 J5.15 K1.1 K2.1 K3.1 R12.2 | length 4778.3
  Top Layer w7: v1(5077.26,2294.24) 5453.24,2294.24 v1(5454,2295)
  Bottom Layer w7: v1(4289.86,2294.24) v1(5077.26,2294.24) 5077.26,1893.76 R12.2@4622.5,1439 ; v1(5454,2295) 5477,2295 v1(5831,1941) 6248,1524 6248,1063 6081.9,896.9 5995.03,896.9 J5.15@5991.75,893.62 5920.22,893.62 5847.72,821.12 5847.72,607.32 5686.78,446.38 J3.6@5632.75,446.38
PC5: J3.5 J5.16 K4.1 K5.1 K6.1 R15.2 | length 6293
  Top Layer w7: 4085.77,1052.18 4309.18,1052.18 v1(4315,1058) ; v1(4547,569) 4584.34,569 4686,467.34 v1(4686,459)
  Bottom Layer w7: v1(715.4,1351.07) 2288.93,1351.07 v1(2290,1350) 3866,1350 v1(3866,1350.07) ; v1(4315,1058) 4315,1061 4499,1245 R15.2@4620.5,1245 4547,1171.5 v1(4547,569) ; v1(4686,459) 4718.31,426.69 J3.5@5632.75,426.69 5686.89,426.69 5861.72,601.52 5861.72,815.32 5920.33,873.94 J5.16@5991.75,873.94
PC6: J3.4 J5.17 K7.1 K8.1 K9.1 R17.2 | length 6367.8
  Top Layer w7: v1(4654,545) 4718,481 v1(4718,402)
  Bottom Layer w7: v1(859.4,145) v1(2434.2,145) v1(4009.01,145) 4253.33,145 4653.67,545.33 v1@4654,545.66 ; R17.2@4620.5,1180 4655,1145.5 4655,546.66 v1@4654,545.66 ; v1(4654,545) v1@4654,545.66 ; v1(4718,402) 4718,405 4720.01,407.01 J3.4@5632.75,407.01 5687.01,407.01 5875.72,595.72 5875.72,809.52 5920.45,854.25 J5.17@5991.75,854.25
SHCP1: 1.11 J4.4 J5.11 | length 6100.6
  Bottom Layer w7: 1.11@2217.46,4048 2154,4048 2139,4033 2139,3906.69 2171.97,3873.72 2999.88,3873.72 3311.6,3562 4388,3562 5317,2633 5317,1231.21 5576.2,972.01 J4.4@5635.06,972.01 5991.39,972.01 J5.11@5991.75,972.36
SHCP2: 2.11 J4.7 J5.8 | length 6378.9
  Bottom Layer w7: 2.11@2195.46,4750 2139,4750 2126,4737 2126,4599.69 2149.97,4575.72 2357.28,4575.72 3329,3604 4408,3604 5359,2653 5359,1248.6 5576.54,1031.06 J4.7@5635.06,1031.06 5991.39,1031.06 J5.8@5991.75,1031.42
SHCP3: 3.11 J4.10 J5.5 | length 4220.5
  Bottom Layer w7: 3.11@4050.46,4026 3.11@4058.46,4034 3996,4034 3979,4017 3979,3891.69 4012.69,3858 4012.97,3858.28 4215.12,3858.28 5401,2672.4 5401,1266 5576.88,1090.12 J4.10@5635.06,1090.12 5991.39,1090.12 J5.5@5991.75,1090.47
STCP1: 1.12 J4.6 J5.9 | length 5834.2
  Bottom Layer w7: 1.12@2217.46,3998 2915.2,3998 3323.2,3590 4402.2,3590 5345,2647.2 5345,1242.8 5576.43,1011.38 J4.6@5635.06,1011.38 5991.39,1011.38 J5.9@5991.75,1011.73
STCP2: 2.12 J4.9 J5.6 | length 6123.3
  Bottom Layer w7: 2.12@2195.46,4700 2272.6,4700 3340.6,3632 4421,3632 5387,2666 5387,1260.2 5576.77,1070.43 J4.9@5635.06,1070.43 5991.39,1070.43 J5.6@5991.75,1070.79
STCP3: 3.12 J4.12 J5.3 | length 3945.9
  Bottom Layer w7: 3.12@4058.46,3984 4129,3984 5429,2684 5429,1277.6 5577.11,1129.49 J4.12@5635.06,1129.49 5635.42,1129.84 J5.3@5991.75,1129.84 J5.3@5998,1129.84
WEI1: 2.1 R1.1 | length 1332.7
  Bottom Layer w7: R1.1@723,4652.5 875.5,4500 2.1@1992.54,4500
WEI2: 2.2 R2.1 | length 1097.6
  Bottom Layer w7: R2.1@937,4651.5 1038.5,4550 2.2@1992.54,4550
WEI3: 2.3 R3.1 | length 882.3
  Bottom Layer w7: R3.1@1132,4652.5 1184.5,4600 2.3@1992.54,4600
WEI4: 2.4 R4.1 | length 1300.9
  Bottom Layer w7: 2.4@1992.54,4650 2073,4650 2106,4683 2106,4845 2145,4884 2763,4884 2991.5,4655.5 R4.1@3007,4655.5
WEI5: 2.5 R5.1 | length 1496.4
  Bottom Layer w7: 2.5@1992.54,4700 2070,4700 2092,4722 2092,4850.8 2139.2,4898 2777.9,4898 2986.9,4689 3141,4689 3179.5,4650.5 R5.1@3229,4650.5
WEI6: 2.6 R6.1 | length 1698.8
  Bottom Layer w7: 2.6@1992.54,4750 2052.41,4750 2078,4775.59 2078,4856.6 2133.4,4912 3068,4912 3113,4867 3113,4831 3153,4791 3153,4739.9 3208.9,4684 3321.25,4684 3355.74,4649.5 R6.1@3417,4649.5
WEI7: 2.7 R7.1 | length 2344.5
  Bottom Layer w7: 2.7@1992.54,4800 2052.41,4800 2064,4811.59 2064,4862.4 2127.6,4926 3043.54,4926 3088.75,4971.21 3707.79,4971.21 3821,4858 R7.1@3821,4489.5
pads on no net: 1.9 2.9 2.15 3.9 J1.6 J3.3 J3.7 MH2.MH1 MH3.MH1 MH4.MH1 MK1.MK MK2.MK MK3.MK

## Polygon pours and split planes (outlines as drawn)
DGND on Top Layer "Bottom Layer-No Net" (solid, remove dead copper, pour order 2): -185,5222 -185,7 ccw(c-85,7) -85,-93 6716,-93 6656,-93 cw(c6656,7) 6556,7 6556,5169 ccw(c6503,5169) 6503,5222 -172,5222
DGND on Bottom Layer "Bottom Layer-No Net" (solid, remove dead copper, pour order 8): -120,5327 -120,-21 ccw(c-20,-21) -20,-121 6523,-121 ccw(c6523,-85) 6559,-85 6559,5339 cw(c6547,5339) 6547,5327 -96,5327
DGND on Bottom Layer "Bottom Layer-No Net" (solid, remove dead copper, pour order 6): -169,5327 5828,5327 cw(c5828,5315) 5840,5315

## Keep-outs
Keep-Out Layer:
  lines w3.94: 216.47,1500.1 ccw(c1104.5,810.5) 238.29,93.69 ; 216.6,1500 cw(c490.5,1246.5) 438,1616 3102.94,1616 ccw(c3102.94,2164.06) 3651,2164.06 3651,2658.87 ccw(c3127.08,2658.87) 3127.08,3182.79 396.26,3182.79 cw(c396.26,3542.05) 37,3542.05 37,4763.26 cw(c404.74,4763.26) 404.74,5131 4309,5131 4383.15,5131 cw(c4383.15,4720.24) 4793.91,4720.24 ; 238.48,93.85 ccw(c422.5,242.5) 417,6 5266,6 ; 4792.56,3625 ccw(c5056.28,3624.72) 4811.9,3525.58 ; 4792.56,3625.05 4793.91,4719.73 ; 4810.65,3528.64 ccw(c5976.33,3960.82) 5454.25,2832.54 ; 5263.5,6.09 ccw(c5334,1087.59) 6415.5,1017.09 ccw(c4539.29,1185.8) 5454.21,2832.47

## Other copper
Top Layer:
  rectangle net DC3V3: 5516,713 5930,769
Bottom Layer:
  rectangle net DC3V3: 5889,713 5930,769
  rectangle net DC3V3: 5515,541 5576,957